# Altium PCB SZG-PMOD-TXR.PcbDoc (part 1 of 2)
Units mil, origin at the board's own origin, x right, y up, seen from the top; angles counter-clockwise.
Board outline 1968.5 x 2755.91 mil, 4 copper layers (L1-TOP, L2-GND, L3-PWR, L4-BOT), stack 59.85 mil thick; 72 components, 82 nets, 269 pads, 170 vias.
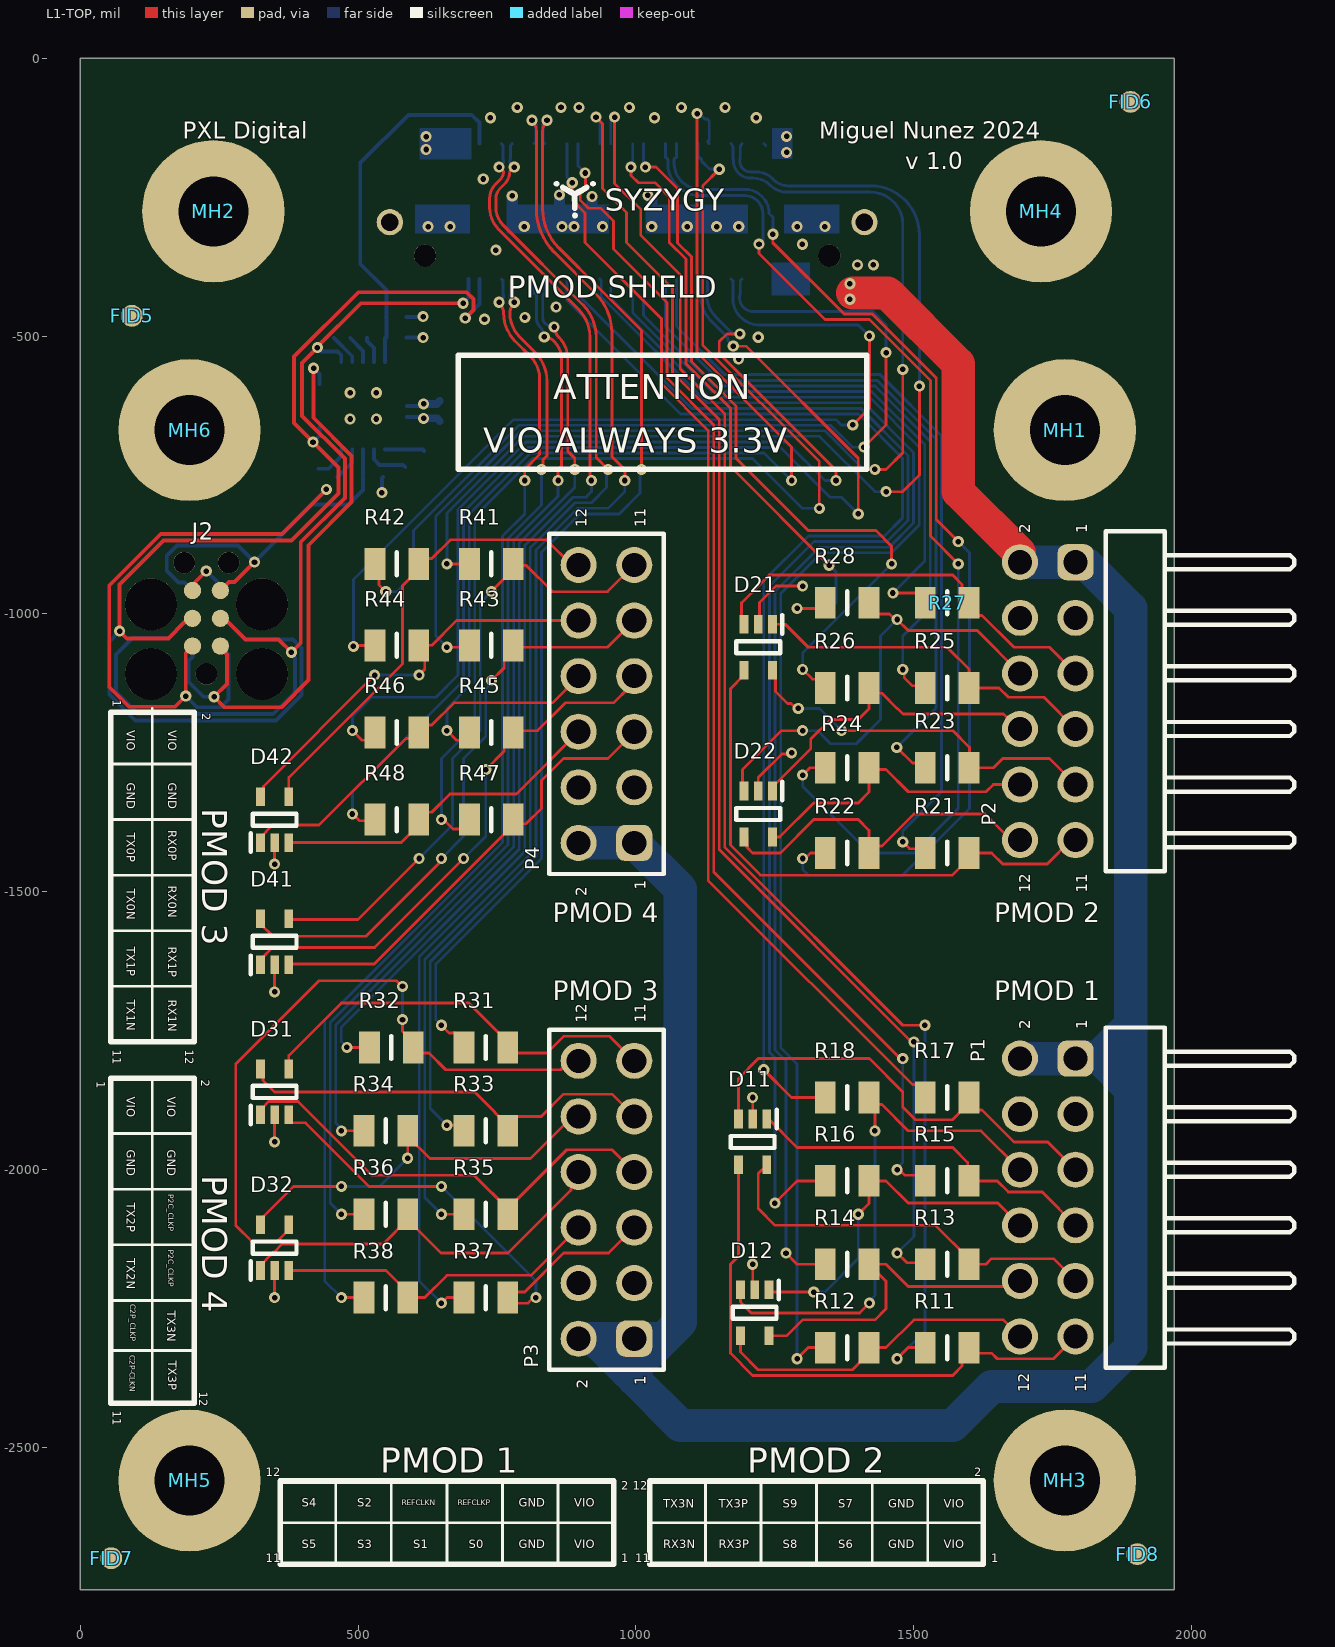
[diagram p0: L1-TOP view]
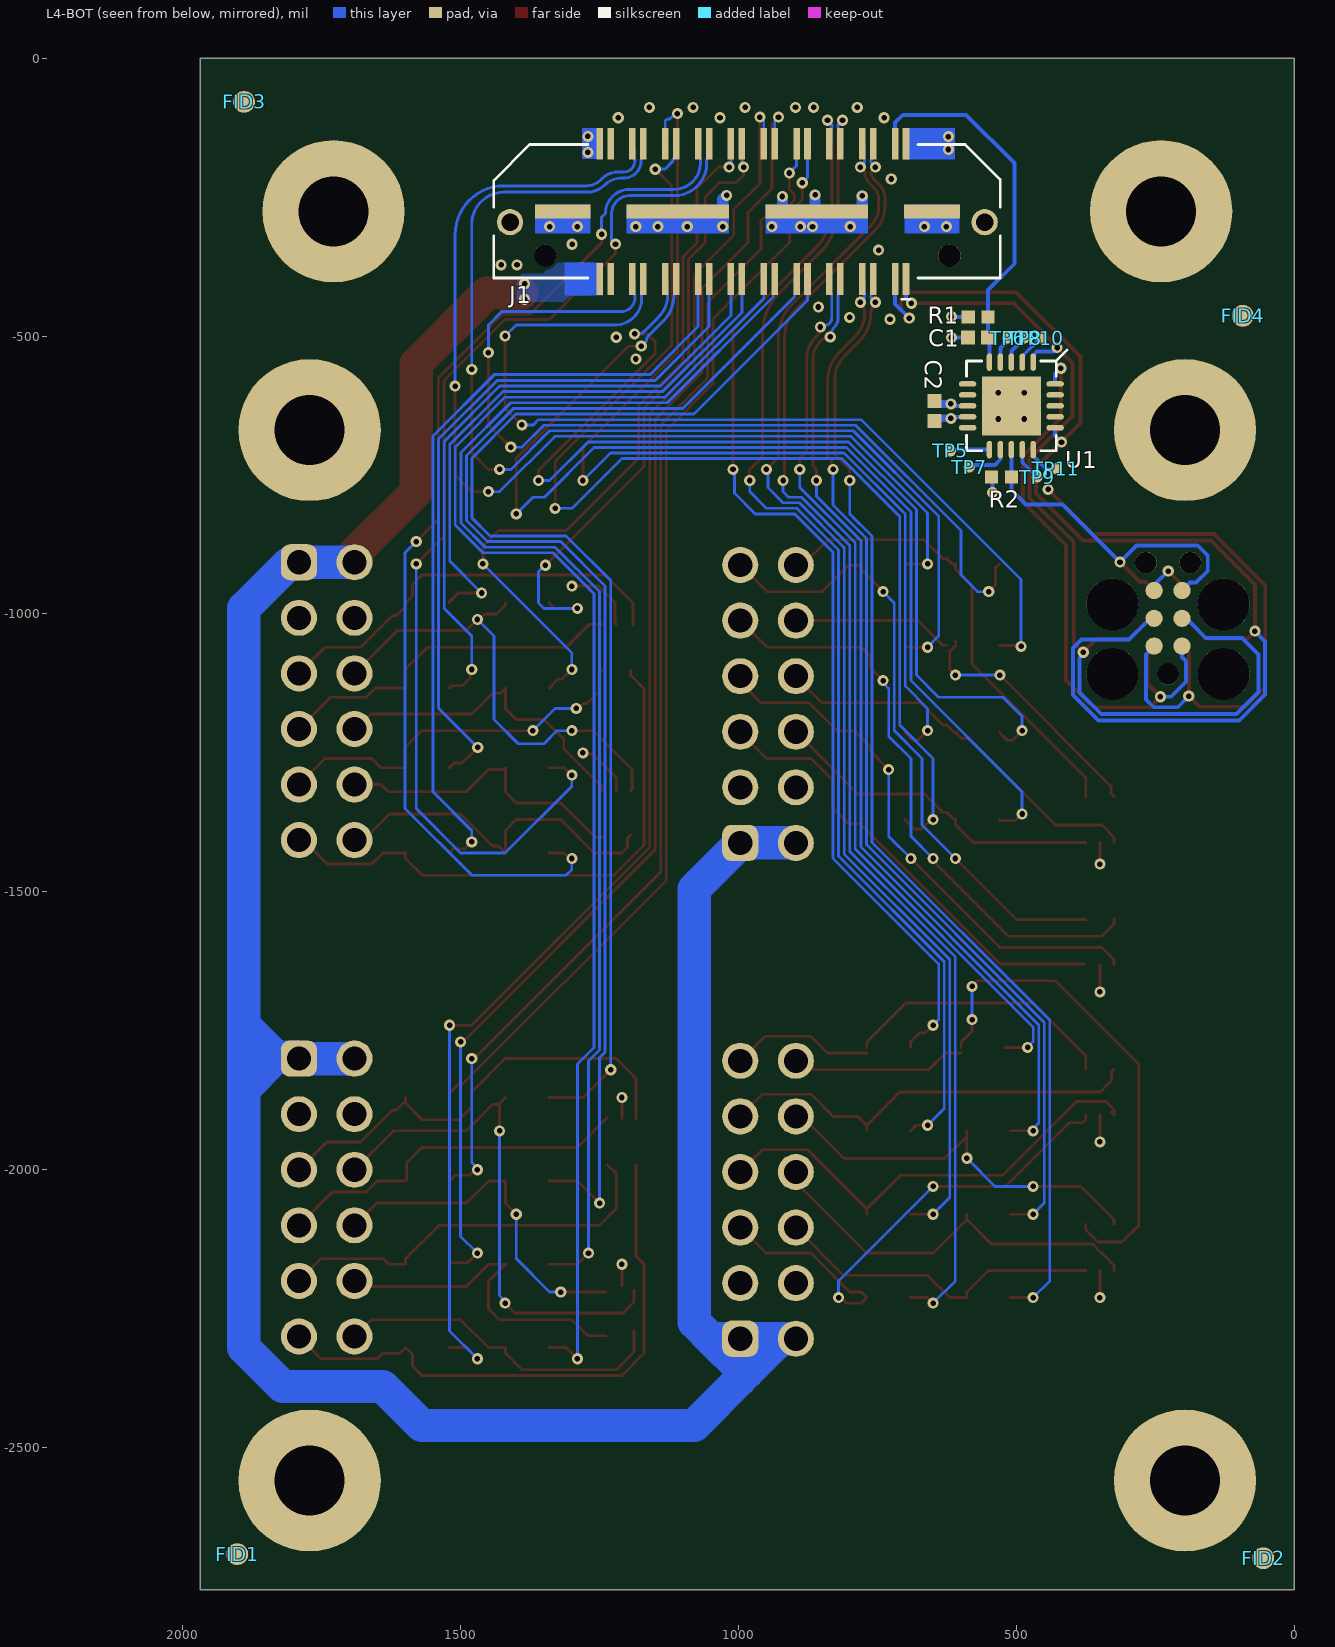
[diagram p1: L4-BOT view, seen from below]
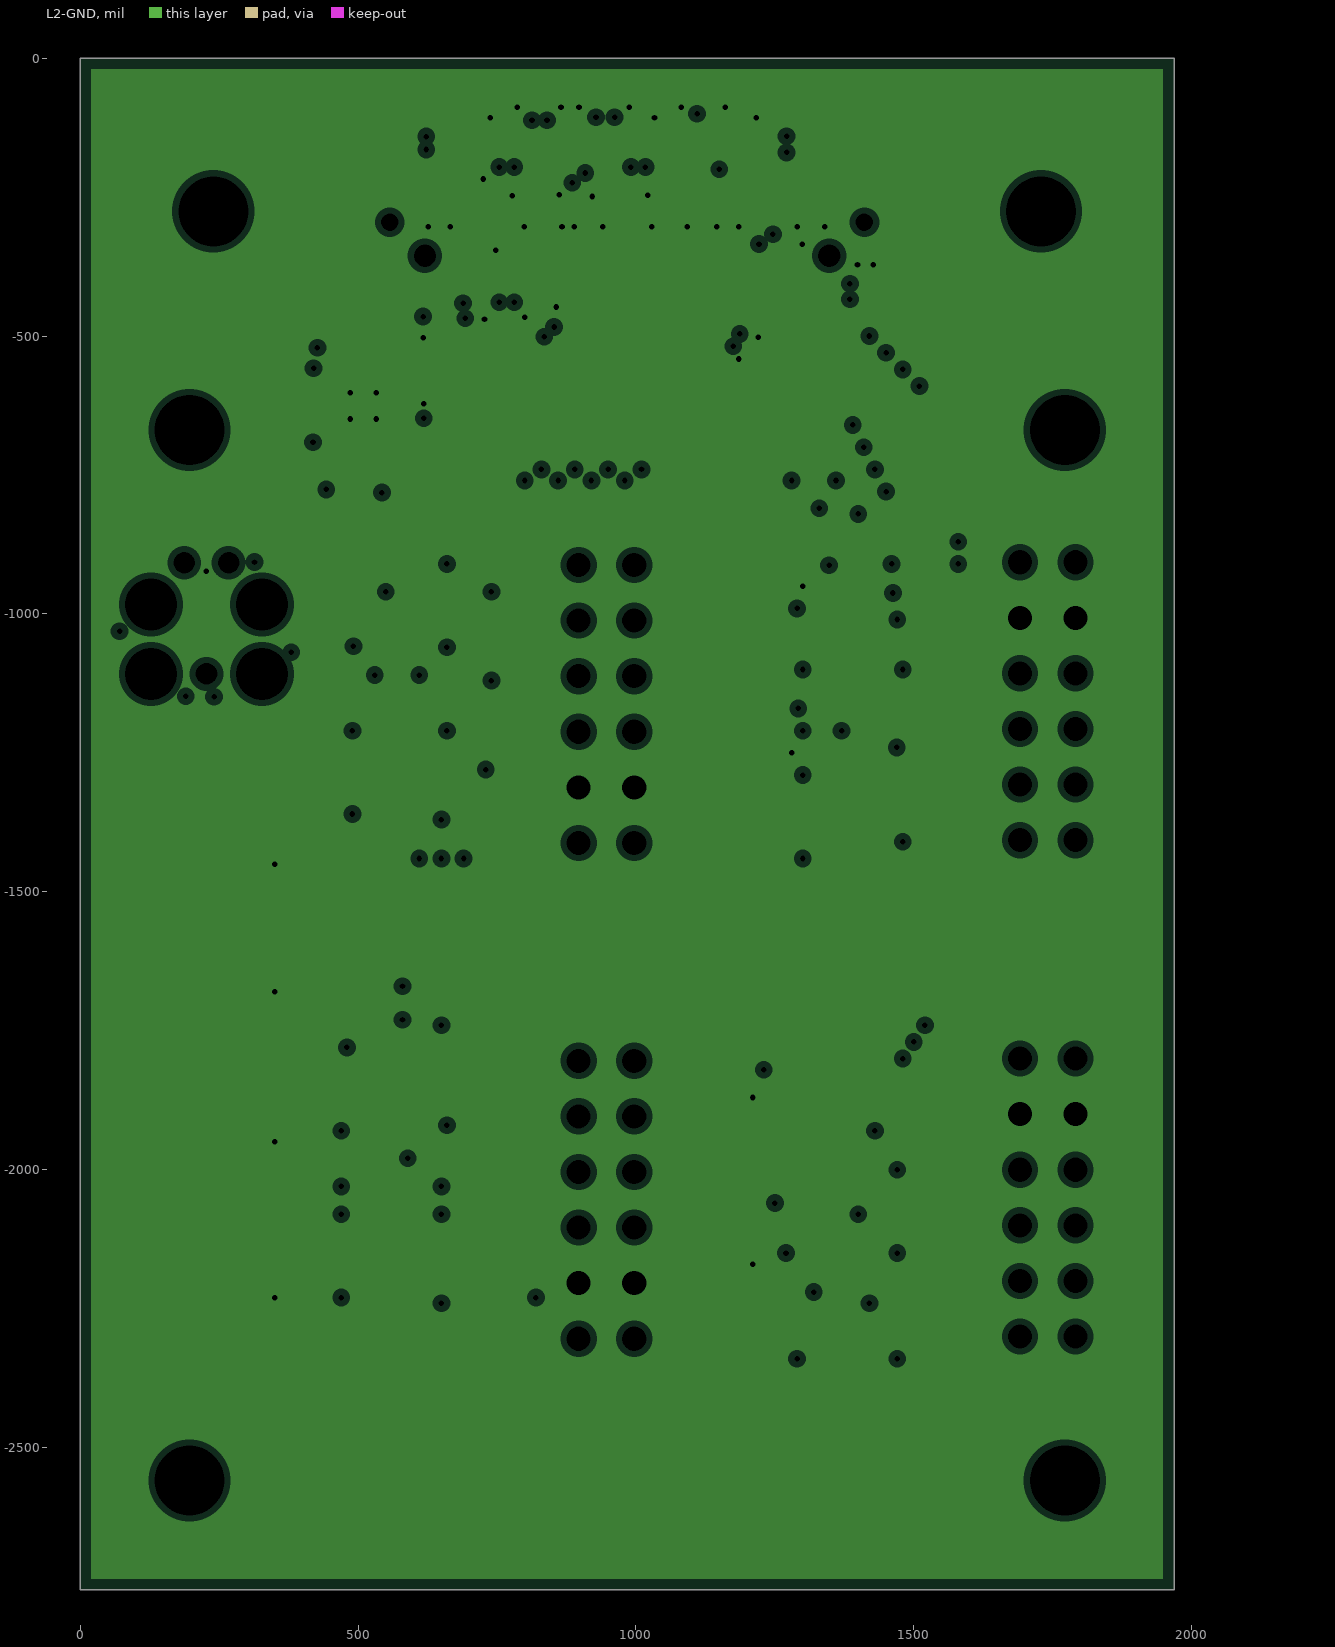
[diagram p2: L2-GND, clearances drawn from the general rule]
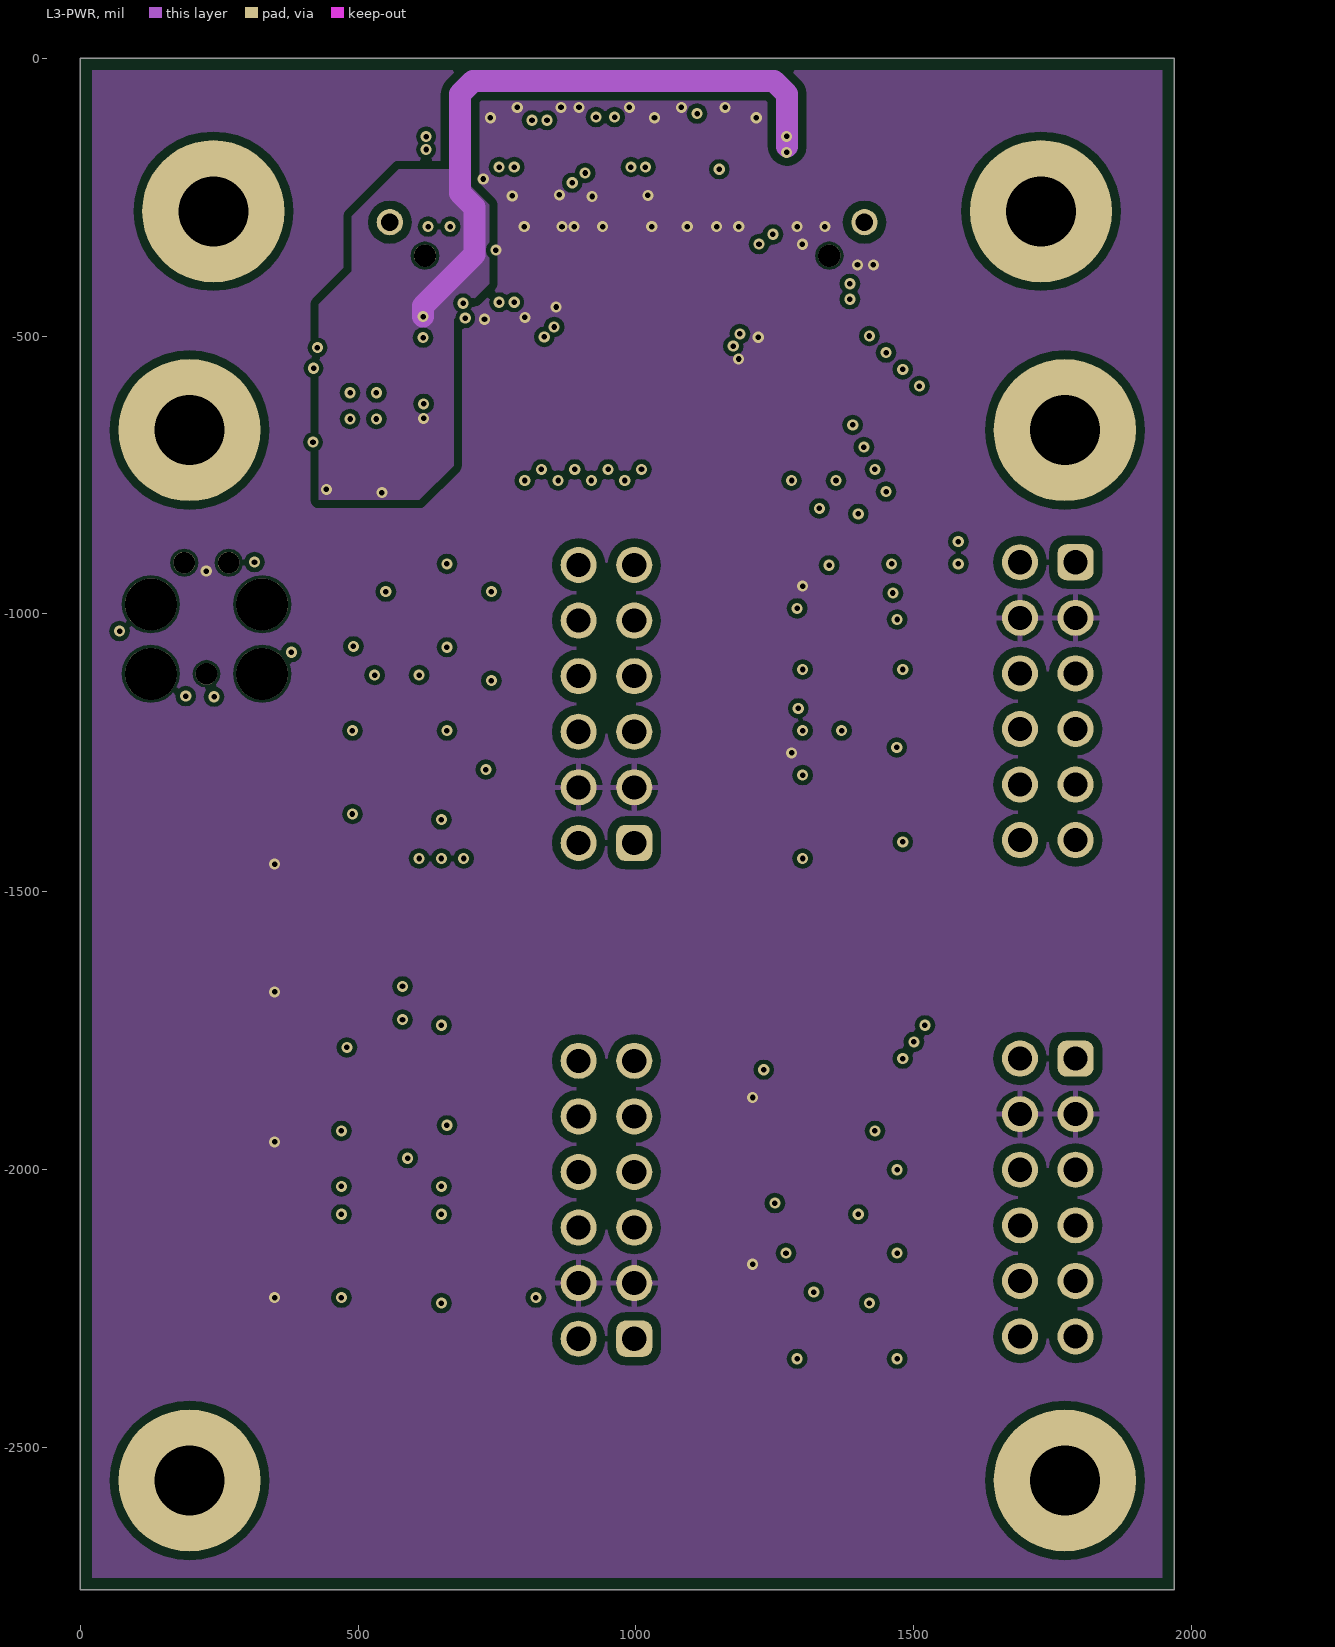
[diagram p3: L3-PWR]
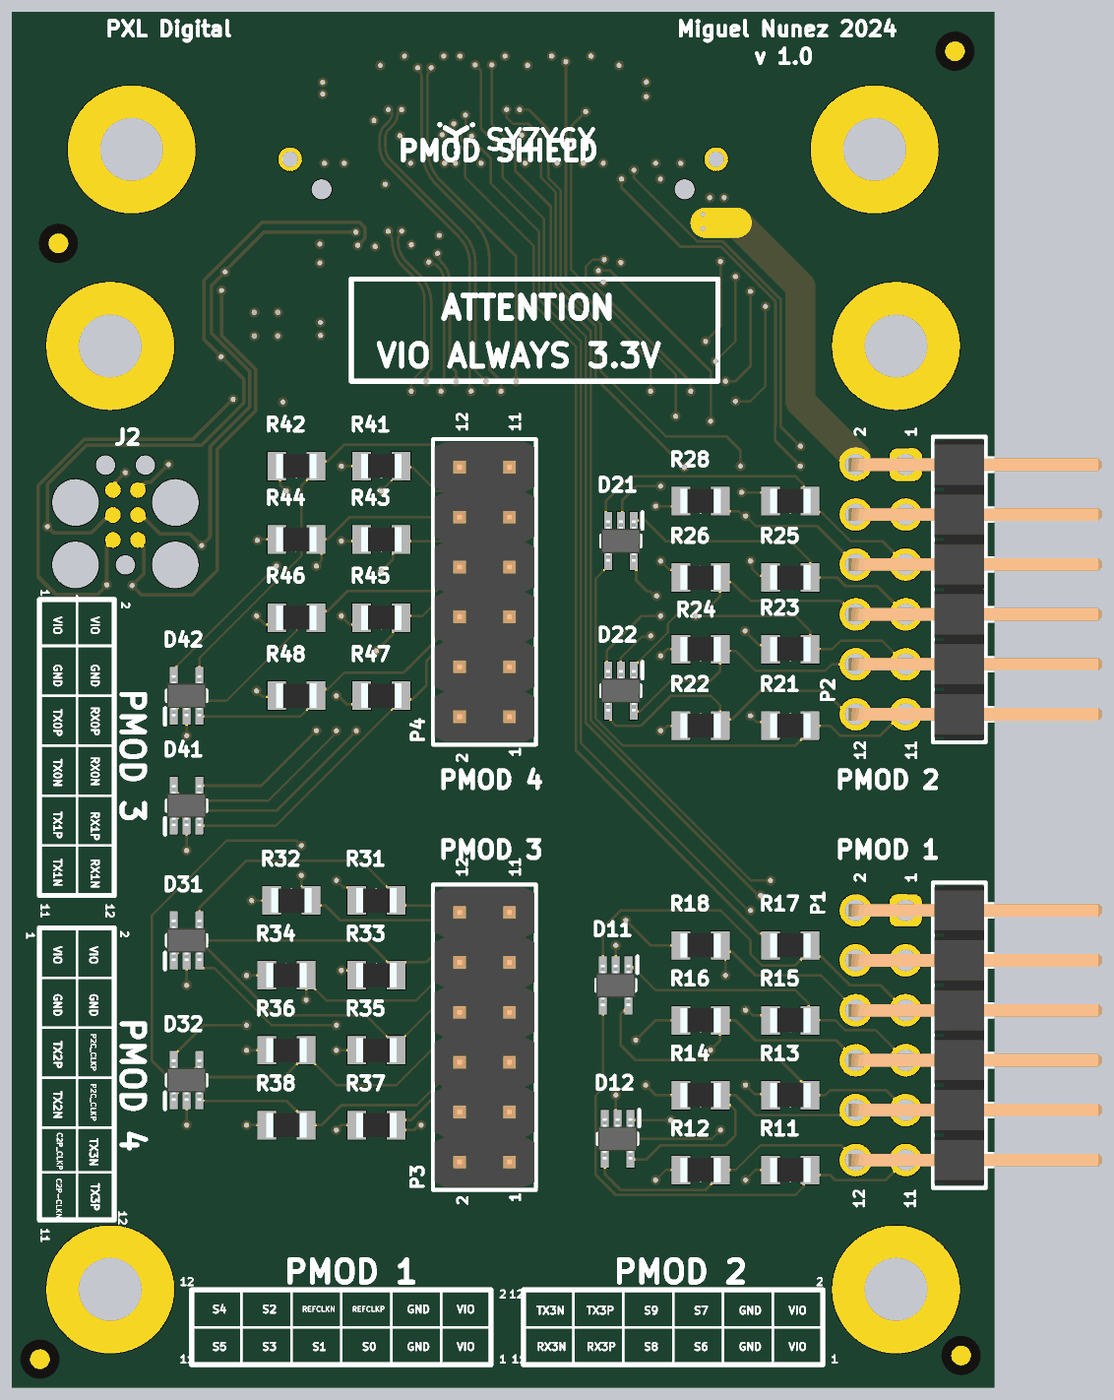
[diagram p5: 3D render of the assembled board from above, using the file's embedded part models]

## Layer stack, top to bottom
Top Solder: solder mask 0.8, Solder Resist, Dk 3.9
L1-TOP: signal copper 1.4
Dielectric1-2: prepreg 5.08, IT180A, Dk 4.2
L2-GND: plane copper 1.2, net GND
Dielectric2-3: core 44.49, IT180A, Dk 4.2
L3-PWR: signal copper 1.2
Dielectric3-4: prepreg 5.08, IT180A, Dk 4.2
L4-BOT: signal copper 1.4
Bottom Solder: solder mask 0.8, Solder Resist, Dk 3.9

## Board outline
0,-2755.91 1968.5,-2755.91 1968.5,0 0,0

## Design rules (kind name [scope] priority, off if disabled: settings)
AssemblyTestPointUsage [All] p1 off:
AssemblyTestpoint [All] p1 off: testpointundercomponent=TRUE minsize=40 maxsize=100 preferedsize=60 minholesize=0 maxholesize=40 preferedholesize=32 testpointgrid=1 usegrid=TRUE gridtolerance=0.01 allowsidetop=TRUE allowsidebottom=TRUE
Clearance ClearanceFiducial [Name Like 'FID*'] p1: gap=50 ignorepadtopadclearanceinfootprint=FALSE except(0: Arc-Hole Track-Hole SMDPad-Hole THPad-Hole Via-Hole Fill-Hole Poly-Hole Region-Hole Text-Hole) // Fiducial clearance.
Clearance [All] p2: gap=5 ignorepadtopadclearanceinfootprint=FALSE except(8: Via-Fill Via-Poly Via-Region; 12: Poly-Region Region-Region; 15: Arc-Poly Track-Poly SMDPad-Poly THPad-Poly Fill-Poly Poly-Poly)
ComponentClearance [All] p1 off: gap=10 collisioncheckmode=3 verticalgap=10 showdistances=FALSE
DiffPairsRouting okDiffRouting100ohm [All] p1: maxlimit=6 minlimit=6 mostfreqgap=6 toplayer_minwidth=5.25 toplayer_maxwidth=5.25 toplayer_prefwidth=5.25 midlayer1_minwidth=5.25 midlayer1_maxwidth=5.25 midlayer1_prefwidth=5.25 bottomlayer_minwidth=5.25 bottomlayer_maxwidth=5.25 bottomlayer_prefwidth=5.25 maxuncoupledlength=500 // Differential pair spacing for all 100ohm diff routes based on Gorilla Stackup.
FabricationTestPointUsage TestPointUsage [All] p1 off: valid=0 allowmultiple=FALSE
FabricationTestpoint Testpoint [All] p1: side=3 testpointundercomponent=TRUE minsize=20 maxsize=100 preferedsize=60 minholesize=0 maxholesize=40 preferedholesize=32 testpointgrid=1 allowsidetop=TRUE allowsidebottom=TRUE usegrid=TRUE gridtolerance=0.5
HoleSize [All] p1: absolutevalues=TRUE maxlimit=150 minlimit=10 maxpercent=80.000 minpercent=20.000
MatchedLengths Matched_SFP_DiffPair [InxSignalClass('xSignals_SFP')] p1: tolerance=10 checknetsindiffpair=TRUE checkdiffpairvsdiffpair=FALSE checkxsignals=FALSE checkothers=FALSE
MatchedLengths Matched_SFP1 [InxSignalClass('xSignals_SFP1')] p2: tolerance=185 checknetsindiffpair=FALSE checkdiffpairvsdiffpair=TRUE checkxsignals=TRUE checkothers=TRUE
MatchedLengths Matched_SFP2 [InxSignalClass('xSignals_SFP2')] p3: tolerance=185 checknetsindiffpair=FALSE checkdiffpairvsdiffpair=TRUE checkxsignals=TRUE checkothers=TRUE
MaximumViaCount okMaxViaDDR2Odt [InNetClass('okDDR2Data') Or InNetClass('okDDR2Masks') Or InNetClass('okDDR2Strobes')] p1: limit=2 // Set max via count of 2 for signals without external termination.
MaximumViaCount okMaxViaDDR2ExtTerm [InNetClass('okDDR2AddrCtrl') Or InNet('DRAM_C\K\') Or InNet('DRAM_CK')] p2: limit=3 // Set max via count of 3 for signals with external termination.
MinimumSolderMaskSliver [All] p1: minsoldermaskwidth=3
PlaneClearance [All] p1: clearance=11
PlaneConnect PlaneConnectNotVia [Not IsVia] p1: planeconnectstyle=Relief reliefexpansion=20 reliefentries=4 reliefconductorwidth=10 reliefairgap=10
PlaneConnect PlaneConnectVia [IsVia] p2: planeconnectstyle=Direct reliefexpansion=20 reliefentries=4 reliefconductorwidth=10 reliefairgap=10
PolygonConnect PolygonConnectVia [IsVia] p1: connectstyle=Direct reliefconductorwidth=8 reliefentries=4 polygonreliefangle="90 Angle" airgapwidth=10
PolygonConnect PolygonConnectNotVia [Not IsVia] p2: connectstyle=Relief reliefconductorwidth=10 reliefentries=4 polygonreliefangle="90 Angle" airgapwidth=10
RoutingVias [All] p1: holewidth=8 width=14 viastyle="Through Hole" minholewidth=8 minwidth=14 maxholewidth=40 maxwidth=60
SilkToSilkClearance [All] p1: silktosilkclearance=0.1
SilkToSolderMaskClearance SilkscreenOverComponentPads [IsPad] p1: minsilkscreentomaskgap=1 clearancetoexposedcopper=FALSE
SolderMaskExpansion [All] p1: expansion=2 istentingtop=FALSE
Width okWidthPower [InNetClass('okPower')] p1: maxlimit=100 minlimit=5 preferedwidth=16 minimp=50.000000 maximp=50.000000 favimp=50.000000
Width [All] p2: maxlimit=100 minlimit=3 preferedwidth=5 minimp=50.000000 maximp=50.000000 favimp=50.000000 // Non-Controlled routes
18 further rules are at their usual default settings.

## Components (designator, comment, footprint, x,y, rotation, side; value= is the part's Value field where it differs from the comment)
C1 "C0402C104K8PACTU" CAPC1005X06N 569,-503 r180 bottom value="0.1 u"
C2 "C0402C104K8PACTU" CAPC1005X06N 647.09,-635.13 r270 bottom value="0.1 u"
D11 "NSQA6V8AW5T2G" SOT65P210X110-5N 1210,-1950 r270 top
D12 "NSQA6V8AW5T2G" SOT65P210X110-5N 1213.63,-2257.5 r270 top
D21 "NSQA6V8AW5T2G" SOT65P210X110-5N 1220,-1060 r270 top
D22 "NSQA6V8AW5T2G" SOT65P210X110-5N 1220,-1360 r270 top
D31 "NSQA6V8AW5T2G" SOT65P210X110-5N 350,-1860 r90 top
D32 "NSQA6V8AW5T2G" SOT65P210X110-5N 350,-2140 r90 top
D41 "NSQA6V8AW5T2G" SOT65P210X110-5N 350,-1590 r90 top
D42 "NSQA6V8AW5T2G" SOT65P210X110-5N 350,-1370 r90 top
FID1 "FIDUCIAL" FID1MM/2MM-SS 1902.06,-2691.54 r90 bottom
FID2 "FIDUCIAL" FID1MM/2MM-SS 56,-2698.85 r90 bottom
FID3 "FIDUCIAL" FID1MM/2MM-SS 1889.76,-78.74 r90 bottom
FID4 "FIDUCIAL" FID1MM/2MM-SS 93,-463.68 r90 bottom
FID5 "FIDUCIAL" FID1MM/2MM-SS 93,-463.68 r90 top
FID6 "FIDUCIAL" FID1MM/2MM-SS 1889.76,-78.74 r90 top
FID7 "FIDUCIAL" FID1MM/2MM-SS 56,-2698.85 r90 top
FID8 "FIDUCIAL" FID1MM/2MM-SS 1902.06,-2691.54 r90 top
J1 "40-pin, ground protection in middle" QTH-020-01-X-D-DP-A-L 984.25,-275.59 r0 bottom locked
J2 "" TC2030-DUAL 227.36,-1107.87 r90 top
MH1 "MTG" MTG-3.2/6.5-PTH 1771.65,-669.29 r0 top locked
MH2 "MTG" MTG-3.2/6.5-PTH 239.76,-275.59 r0 top locked
MH3 "MTG" MTG-3.2/6.5-PTH 1771.65,-2559.06 r0 top locked
MH4 "MTG" MTG-3.2/6.5-PTH 1728.74,-275.59 r0 top locked
MH5 "MTG" MTG-3.2/6.5-PTH 196.85,-2559.06 r0 top locked
MH6 "MTG" MTG-3.2/6.5-PTH 196.85,-669.29 r0 top locked
P1 "61301221021" 61301221021 1898.48,-2050 r90 top
P2 "61301221021" 61301221021 1898.48,-1157 r90 top
P3 "61301221121" 61301221121 947,-2054 r90 top
P4 "61301221121" 61301221121 947,-1162 r90 top
R1 "CRCW040210K0FKED" RESC1005X06N 569,-465.74 r0 bottom value="10.0 k"
R2 "CRCW040210K0FKED" RESC1005X06N 527,-753.74 r0 bottom value="10.0 k"
R11 "200" RESC2012X50N 1560,-2320 r0 top
R12 "200" RESC2012X50N 1380,-2320 r180 top
R13 "200" RESC2012X50N 1560,-2170 r0 top
R14 "200" RESC2012X50N 1380,-2170 r180 top
R15 "200" RESC2012X50N 1560,-2020 r0 top
R16 "200" RESC2012X50N 1380,-2020 r180 top
R17 "200" RESC2012X50N 1560,-1870 r0 top
R18 "200" RESC2012X50N 1380,-1870 r180 top
R21 "200" RESC2012X50N 1560,-1430 r0 top
R22 "200" RESC2012X50N 1380,-1430 r180 top
R23 "200" RESC2012X50N 1560,-1276.67 r0 top
R24 "200" RESC2012X50N 1380,-1276.67 r180 top
R25 "200" RESC2012X50N 1560,-1133.33 r0 top
R26 "200" RESC2012X50N 1380,-1133.33 r180 top
R27 "200" RESC2012X50N 1560,-980 r0 top
R28 "200" RESC2012X50N 1380,-980 r180 top
R31 "200" RESC2012X50N 730,-1780 r0 top
R32 "200" RESC2012X50N 560,-1780 r180 top
R33 "200" RESC2012X50N 730,-1930 r0 top
R34 "200" RESC2012X50N 550,-1930 r180 top
R35 "200" RESC2012X50N 730,-2080 r0 top
R36 "200" RESC2012X50N 550,-2080 r180 top
R37 "200" RESC2012X50N 730,-2230 r0 top
R38 "200" RESC2012X50N 550,-2230 r180 top
R41 "200" RESC2012X50N 740,-910 r0 top
R42 "200" RESC2012X50N 570,-910 r180 top
R43 "200" RESC2012X50N 740,-1056.67 r0 top
R44 "200" RESC2012X50N 570,-1056.67 r180 top
R45 "200" RESC2012X50N 740,-1213.33 r0 top
R46 "200" RESC2012X50N 570,-1213.33 r180 top
R47 "200" RESC2012X50N 740,-1370 r0 top
R48 "200" RESC2012X50N 570,-1370 r180 top
TP5 "TESTPOINT-SMD20" TP-SMD20 619,-706.74 r90 bottom
TP6 "TESTPOINT-SMD20" TP-SMD20 516,-503.74 r90 bottom
TP7 "TESTPOINT-SMD20" TP-SMD20 585,-735.74 r90 bottom
TP8 "TESTPOINT-SMD20" TP-SMD20 486,-503.74 r90 bottom
TP9 "TESTPOINT-SMD20" TP-SMD20 463,-753.74 r90 bottom
TP10 "TESTPOINT-SMD20" TP-SMD20 457,-503.74 r90 bottom
TP11 "TESTPOINT-SMD20" TP-SMD20 429,-738.74 r90 bottom
U1 "ATTINY44A-MU" QFN-EP-20 509.32,-625.68 r270 bottom

## Footprints (in the part's own frame and the unit in brackets; to place one, negate y for a bottom-side part, rotate by r counter-clockwise, add the part's x,y. Pads: shape width x height; smd on the part's side, far side on the other; paste and mask are expansions set on the pad)
61301221021 [mm] "Pin Header, pitch 2.54 mm, THT, Angled, dual row, 12p"
  rrect50% 1.65x1.65 hole 1.1: 1(6.35,2.73)
  round 1.65 hole 1.1: 2(6.35,5.27) 3(3.81,2.73) 4(3.81,5.27) 5(1.27,2.73) 6(1.27,5.27) 7(-1.27,2.73) 8(-1.27,5.27) 9(-3.81,2.73) 10(-3.81,5.27) 11(-6.35,2.73) 12(-6.35,5.27)
  silkscreen extent -7.77,-7.27 7.77,1.35, body extent -7.62,-7.27 7.62,5.63, height 5.12
61301221121 [mm] "Pin Header, pitch 2.54 mm, THT, Vertical, dual row, 12p"
  rrect50% 1.65x1.65 hole 1.1: 1(-6.35,-1.27)
  round 1.65 hole 1.1: 2(-6.35,1.27) 3(-3.81,-1.27) 4(-3.81,1.27) 5(-1.27,-1.27) 6(-1.27,1.27) 7(1.27,-1.27) 8(1.27,1.27) 9(3.81,-1.27) 10(3.81,1.27) 11(6.35,-1.27) 12(6.35,1.27)
  silkscreen extent -7.77,-2.62 7.77,2.62, body extent -7.62,-2.54 7.62,2.54, height 8.59
CAPC1005X06N [mm] "Chip Capacitor, 2-Leads, Body 1.00x0.50mm, IPC Medium Density"
  rect 0.64x0.64 smd: 1(-0.46,0) 2(0.46,0)
  body extent -0.55,-0.3 0.55,0.3, height 0.6
FID1MM/2MM-SS [mm] "Fiducial 1mm copper, 2mm soldermask, single-side"
  round 1 smd paste-0.5 mask+0.5: FID?(0,0)
MTG-3.2/6.5-PTH [mm] "Mounting hole, 3.2mm ID, 6.5mm OD, plated"
  round 6.5 hole 3.2: 1(0,0)
QFN-EP-20 [mm]
  oval 0.8x0.25 smd mask+0.051: 1(-2,1) 2(-2,0.5) 3(-2,0) 4(-2,-0.5) 5(-2,-1) 11(2,-1) 12(2,-0.5) 13(2,0) 14(2,0.5) 15(2,1)
  oval 0.25x0.8 smd mask+0.051: 6(-1,-2) 7(-0.5,-2) 8(0,-2) 9(0.5,-2) 10(1,-2) 16(1,2) 17(0.5,2) 18(0,2) 19(-0.5,2) 20(-1,2)
  rect 2.7x2.7 smd paste-100 mask+0.051: PAD(0,0)
  silkscreen extent -2.55,-2.05 2.05,2.55
QTH-020-01-X-D-DP-A-L [mm] "0.5mm hi-speed, high-density header (female), 80-pin, latching, ground protection in middle"
  rect 2.54x0.64 smd mask+0.051: 0(-8.44,0) 0(8.44,0)
  rect 4.7x0.64 smd mask+0.051: 0(-3.17,0) 0(3.18,0)
  rect 0.3x1.45 smd mask+0.051: 1(-7.25,3.09) 2(-7.25,-3.09) 3(-6.75,3.09) 4(-6.75,-3.09) 5(-5.75,3.09) 6(-5.75,-3.09) 7(-5.25,3.09) 8(-5.25,-3.09) 9(-4.25,3.09) 10(-4.25,-3.09) 11(-3.75,3.09) 12(-3.75,-3.09) 13(-2.75,3.09) 14(-2.75,-3.09) 15(-2.25,3.09) 16(-2.25,-3.09) 17(-1.25,3.09) 18(-1.25,-3.09) 19(-0.75,3.09) 20(-0.75,-3.09) 21(0.25,3.09) 22(0.25,-3.09) 23(0.75,3.09) 24(0.75,-3.09) 25(1.75,3.09) 26(1.75,-3.09) 27(2.25,3.09) 28(2.25,-3.09) 29(3.25,3.09) 30(3.25,-3.09) 31(3.75,3.09) 32(3.75,-3.09) 33(4.75,3.09) 34(4.75,-3.09) 35(5.25,3.09) 36(5.25,-3.09) 37(6.25,3.09) 38(6.25,-3.09) 39(6.75,3.09) 40(6.75,-3.09)
  round 1.2 hole 0.8 paste-2539.97: MH(-10.845,0.5) MH(10.845,0.5)
  round 1.02 hole 1.02 unplated paste-2539.97: MH(-9.24,2.03) MH(9.24,2.03)
  silkscreen extent -11.55,-3.05 11.58,4.01
RESC1005X06N [mm] "Chip Resistor, 2-Leads, Body 1.00x0.50mm, IPC Medium Density"
  rect 0.6x0.6 smd: 1(-0.45,0) 2(0.45,0)
  body extent -0.55,-0.3 0.55,0.3, height 0.6
RESC2012X50N [mm]
  rect 0.95x1.45 smd: 1(-1,0) 2(1,0)
  silkscreen extent 0,-0.53 0,0.53, body extent -1.02,-0.63 1.02,0.63, height 0.5
SOT65P210X110-5N [mm]
  rect 0.85x0.4 smd: 1(-1.05,0.65) 2(-1.05,0) 3(-1.05,-0.65) 4(1.05,-0.65) 5(1.05,0.65)
  silkscreen extent -1.48,-1 0.28,1.1, body extent -1.05,-1 1.05,1, height 1.1
TC2030-DUAL [mil]
  round 31 smd paste-393.7: 1(50,-25) 2(50,25) 3(100,-25) 4(100,25) 5(150,-25) 6(150,25)
  round 31 smd far side paste-393.7: 1(50,25) 2(50,-25) 3(100,25) 4(100,-25) 5(150,25) 6(150,-25)
  round 39 hole 39 unplated: A(0,0) B(200,40) C(200,-40)
  round 93.5 hole 93.5 unplated: D(0,-100) E(125,-100) F(0,100) G(125,100)
TP-SMD20 [mil] "Test point, surface-mount, 20mil"
  round 20 smd paste-78.74: 1(0,0)

## Part data
C1 C2: library part 000070, "Ceramic capacitor", Manufacturer=Kemet, Tolerance (%)=10, ValueFloat=1E-7, Description 2="SM-0402, 10%, 10v", Manufacturer_PN=C0402C104K8PACTU, PartNumber=000070
  C1: updated_on="5/15/2017 4:50:04 PM"
  C2: updated_on="11/17/2016 12:16:56 PM"
D11 D12 D21 D22 D31 D32 D41 D42: "Diode", Manufacturer_Name=onsemi, Mouser Part Number=863-NSQA6V8AW5T2G, Arrow Part Number=NSQA6V8AW5T2G, Arrow Price/Stock=https://www.arrow.com/en/products/nsqa6v8aw5t2g/on-semiconductor?region=nac, Datasheet Link=http://www.onsemi.com/pub/Collateral/NSQA6V8AW5T2-D.PDF, Height=1.1mm, Manufacturer_Part_Number=NSQA6V8AW5T2G, Mouser Price/Stock=https://www.mouser.co.uk/ProductDetail/onsemi/NSQA6V8AW5T2G?qs=ZXBb0xZ9WeDSeR92l0JbzA%3D%3D
FID1 FID2 FID3 FID4 FID5 FID6 FID7 FID8: "PCB fiducial"
J1: library part 001605, "0.5mm hi-speed, high-density header (female)", Manufacturer=Samtec, Manufacturer_PN=QTH-020-01-F-D-DP-A, AligniPartNumber=001605, parttype=Connector
J2: library part 002062, "Tag-Connect 6-pin Plug-of-Nails spring-pin cable footprint", Manufacturer=Tag-Connect, Manufacturer_PN=TC2030-IDC, AligniPartNumber=002062, parttype=Connector
MH1 MH2 MH3 MH4 MH5 MH6: "Mounting hole"
P1 P2: "WR-PHD Pin Header, THT, Angled, pitch 2.54mm, 2 Row, 12P", Contact Resistance=20mΩ, Manufacturer="Wurth Elektronik", Operating Temperature Max=105°C, Operating Temperature Min=-40°C, Rated Current=3A, Withstanding Voltage=500V, Working Voltage=250V, Category="Board-to-Board Connectors", ComponentLink1Description="Website Link", ComponentLink1URL=https://www.we-online.com/redexpert/article/61301221021?ad, ComponentLink2Description="Datasheet Link", ComponentLink2URL=https://www.we-online.com/redexpert/spec/61301221021?ad, Gender="Pin Header", Manufacturer Part Number=61301221021, Match Code=WR-PHD, Mount="Through Hole", Number of Pins=12, Number of Rows=2, Orientation=Angled, Packaging=Bag, Pitch=2.54mm
P3 P4: "WR-PHD Pin Header, THT, Vertical, pitch 2.54mm, 2 Row, 12P", Contact Resistance=20mΩ, Manufacturer="Wurth Elektronik", Operating Temperature Max=105°C, Operating Temperature Min=-40°C, Rated Current=3A, Withstanding Voltage=500V, Working Voltage=250V, Category="Board-to-Board Connectors", ComponentLink1Description="Website Link", ComponentLink1URL=https://www.we-online.com/redexpert/article/61301221121?ad, ComponentLink2Description="Datasheet Link", ComponentLink2URL=https://www.we-online.com/redexpert/spec/61301221121?ad, Gender="Pin Header", Manufacturer Part Number=61301221121, Match Code=WR-PHD, Mount="Through Hole", Number of Pins=12, Number of Rows=2, Orientation=Vertical, Packaging=Bag, Pitch=2.54mm
R1 R2: library part 001521, "Thick-film resistor", Manufacturer=Vishay, Tolerance (%)=1, ValueFloat=10000, Description 2="SM-0402, 1%, 1/16W", Manufacturer_PN=CRCW040210K0FKED, PartNumber=001521, updated_on="3/21/2017 2:29:49 PM", x_lifecycle_status=Production
R11 R12 R13 R14 R15 R16 R17 R18 R21 R22 R23 R24 R25 R26 R27 R28 R31 R32 R33 R34 R35 R36 R37 R38 R41 R42 R43 R44 R45 R46 R47 R48: library part 0805_SMD_Resistor, "Resistor", Manufacturer_Name=Vishay, Manufacturer_Part_Number=CRCW08055K60JNEA, Datasheet Link=http://www.vishay.com/docs/20035/dcrcwe3.pdf, Height=0.5mm
TP5 TP6 TP7 TP8 TP9 TP10 TP11: "Test point, surface-mount, 20mil"
U1: library part 001552, "8-bit MCU, 4 KB flash, 256 bytes EEPROM", Manufacturer=Microchip, Manufacturer_PN=ATTINY44A-MU, PartNumber=001552, updated_on="5/23/2017 10:51:21 AM", x_lifecycle_status=Production

## Via types
v1: diameter 20, hole 10, L1-TOP to L4-BOT, tented both sides, 170 vias

## Nets (pads, with @x,y where several pads share a name; then routed paths per layer and width w, separated by ;. In a path a pad name is that pad's centre, name@x,y a point inside that pad or via, vN(x,y) a via of type N, cw(c..) or ccw(c..) an arc to the next point about the centre after c; other vN are vias at no path point)
+3.3V: C2.2 J1.40 J2.2 R1.2 R2.2 U1.9 | length 2363.2
  L1-TOP w7: J2.2@202.36,-1057.87 190,-1070.24 v1(190,-1148) 171,-1167 88,-1167 52.5,-1131.5 52.5,-948.53 145.03,-856 363,-856 v1(443,-776)
  L3-PWR w40: v1(617,-465) 617,-446 709.45,-353.55 709.45,-268.51 683.53,-242.58 683.53,-64.76 706.96,-41.33 1248.57,-41.33 1272,-64.76 1272,-159
  L4-BOT w7: v1(190,-1148) 209.98,-1167.98 253.02,-1167.98 267,-1154 267,-1072.51 J2.2@252.36,-1057.87 ; v1(543,-781.74) 543,-755.46 R2.2@544.72,-753.74 ; R1.2@586.72,-465.74 v1@614,-465.74 ; U1.9@588.06,-645.36 615.33,-645.36 v1(618.09,-648.13)
  L4-BOT w14: v1(618.09,-648.13) 641.98,-648.13 C2.2@647.09,-653.24
  other v1: 1271,-169.74 1271,-140.74
+5V: J1.2
  other v1: 622.65,-164.5 622.65,-141.21
C2P_CLKN: J1.36 R41.1 | length 1949.2
  L1-TOP w5: v1(660,-910) R41.1@700.63,-910 ; v1(1450,-780) 1480,-780 1510,-750 v1(1510,-590)
  L4-BOT w5: v1(660,-910) 660,-818.28 797.78,-680.5 1330.5,-680.5 1430,-780 v1(1450,-780)
  L4-BOT w5.25: J1.36@1190.94,-153.94 ccw(c1198.86,-161.86) 1187.66,-161.86 1187.66,-181.33 cw(c1186.06,-181.33) 1187.2,-182.46 ccw(c1188.33,-183.59) 1186.73,-183.59 1186.73,-185.04 ccw(c1206.41,-185.04) 1206.41,-204.72 1215.75,-204.72 cw(c1215.75,-247.69) 1246.13,-217.31 1247.48,-218.66 ccw(c1274.61,-191.53) 1274.61,-229.89 1422.24,-229.89 cw(c1422.24,-317.65) 1510,-317.65 v1(1510,-590)
C2P_CLKP: J1.34 R43.1 | length 2036.2
  L1-TOP w5: v1(660,-1060) 697.3,-1060 R43.1@700.63,-1056.67 ; v1(1430,-740) 1450,-740 1480,-710 v1(1480,-560)
  L4-BOT w5: v1(660,-1060) 640,-1040 640,-824.14 793.64,-670.5 1340,-670.5 1409.5,-740 v1(1430,-740)
  L4-BOT w5.25: J1.34@1171.26,-153.94 cw(c1163.34,-161.86) 1174.54,-161.86 1174.54,-181.33 ccw(c1176.14,-181.33) 1175.01,-182.46 cw(c1173.88,-183.59) 1175.48,-183.59 1175.48,-185.04 ccw(c1206.41,-185.04) 1206.41,-215.97 1211.09,-215.97 cw(c1211.09,-258.94) 1241.47,-228.56 ccw(c1271.85,-198.18) 1271.85,-241.14 1422.24,-241.14 cw(c1422.24,-298.9) 1480,-298.9 v1(1480,-560)
GND: C1.1 C2.1 D11.2 D12.2 D21.2 D22.2 D31.2 D32.2 D41.2 D42.2 J1.0 J2.6 P1.3 P1.4 P2.3 P2.4 P3.3 P3.4 P4.3 P4.4 U1.8 U1.PAD | length 994.8
  L1-TOP w5: v1(350,-2230) D32.2@350,-2181.34 ; v1(350,-1950) D31.2@350,-1901.34 ; v1(350,-1680) D41.2@350,-1631.34 ; v1(350,-1450) D42.2@350,-1411.34 ; D12.2@1210,-2209.03 v1(1210,-2170) ; D11.2@1210,-1907.26 v1(1210,-1870) ; D22.2@1220,-1318.66 1220,-1294.43 1262.5,-1251.93 1278.07,-1251.93 v1(1280,-1250) ; D21.2@1220,-1018.66 1222.46,-1016.2 1222.46,-979.51 1251.97,-950 v1(1300,-950)
  L1-TOP w7: J2.6@202.36,-957.87 206.96,-953.28 206.96,-943.05 v1(227,-923)
  L4-BOT w7: v1(227,-923) 247.77,-943.77 247.77,-953.28 J2.6@252.36,-957.87 ; C1.1@587.11,-503 v1(617,-503) ; U1.8@588.06,-625.68 614.54,-625.68 v1(618.09,-622.13)
  L4-BOT w14: v1(618.09,-622.13) 641.98,-622.13 C2.1@647.09,-617.02
  L4-BOT w20: v1(777.56,-248.03) 777.56,-272.99 780.16,-275.59 J1.0@859.45,-275.59 J1.0@864.17,-275.59 ; v1(862.2,-246.06) 862.2,-273.62 J1.0@864.17,-275.59 ; J1.0@918.66,-275.59 J1.0@864.17,-275.59 ; v1(921.26,-249.02) 921.26,-284.41 v1(940,-303.15) ; v1(1021.65,-247.05) 1028.44,-253.84 v1(1028.44,-303.15)
  other v1: 485.69,-649.3 532.94,-649.3 485.69,-602.06 532.94,-602.06 1184.75,-541.36 1220.16,-502.23 727.6,-469.92 800.2,-466.54 856.3,-447.83 1398.62,-372.05 1427.17,-372.05 748.03,-345.47 1299.45,-334.91 626,-303.12 665.81,-303.12 799,-303.15 867,-303.28 888.78,-303.28 1092.38,-303.15 1145.08,-303.15 1185,-303.15 1290,-303.15 1340,-303.15 725.39,-217.52 738.19,-107.28 1033.46,-107.28 1216.54,-107.28 786.42,-88.58 865.16,-88.58 897.64,-88.58 988.19,-88.58 1081.69,-88.58 1160.43,-88.58
MCU_MISO: J2.1 U1.20 | length 1082.2
  L1-TOP w7: J2.1@252.36,-1057.87 252.36,-1061.47 264,-1073.11 264,-1126 v1(241,-1149) 260,-1168 362,-1168 411,-1119 411,-876.4 488.57,-798.83 488.57,-715.69 420,-647.12 v1(420,-558)
  L4-BOT w7: J2.1@202.36,-1057.87 202.36,-1077.64 195,-1085 195,-1122 222,-1149 v1(241,-1149) ; v1(420,-558) 430.57,-568.57 U1.20@430.57,-586.31
MCU_RESET_B: J2.5 R2.1 U1.13 | length 666.3
  L1-TOP w7: J2.5@252.36,-957.87 267.83,-942.41 277.87,-942.41 313.52,-906.76 v1(313.75,-906.76)
  L4-BOT w7: J2.5@202.36,-957.87 202.06,-957.87 187.66,-943.48 176.91,-943.48 156,-922.57 156,-895 174,-877 284,-877 v1(313.75,-906.76) 417.51,-803 483,-803 509.28,-776.72 R2.1@509.28,-753.74 ; R2.1@509.32,-749.71 U1.13@509.32,-704.42
MCU_SCL_USCK: J1.1 J2.3 U1.1 | length 1851
  L1-TOP w7: J2.3@252.36,-1007.87 258.86,-1007.87 266.67,-1015.68 267.32,-1015.68 297.64,-1046 357,-1046 v1(380,-1069) 397,-1052 397,-870.72 476.57,-791.15 476.57,-720.66 399.53,-643.62 399.53,-548.47 v1(427,-521) ; v1@425.26,-521 505.26,-441 v1(689,-441)
  L4-BOT w7: J2.3@202.36,-1007.87 195.87,-1007.87 188.23,-1015.51 187.23,-1015.51 159.43,-1043.31 94.49,-1043.31 64.6,-1073.19 64.6,-1140.34 104.24,-1179.98 347.6,-1179.98 386.5,-1141.08 386.5,-1079.02 380,-1072.52 v1(380,-1069) ; v1(427,-521) 433.74,-527.74 463,-527.74 469.94,-534.69 U1.1@469.94,-546.94 ; v1(689,-441) 698.82,-431.18 J1.1@698.82,-397.24
MCU_SDA_MOSI: J1.3 J2.4 U1.16 | length 2264.5
  L1-TOP w7: J2.4@202.36,-1007.87 195.87,-1007.87 188.23,-1015.51 187.23,-1015.51 158.74,-1044 84,-1044 v1(71,-1031) 71,-947 150,-868 380.03,-868 464.57,-783.46 464.57,-736.57 v1(419,-691) 384.75,-656.75 384.75,-537.08 500.58,-421.26 695.42,-421.26 707.5,-433.34 707.5,-453.34 v1(692.91,-467.92)
  L4-BOT w7: v1(71,-1031) 52.6,-1049.4 52.6,-1145.31 99.27,-1191.98 352.57,-1191.98 398.5,-1146.05 398.5,-1061.34 383.16,-1046 297.39,-1046 267.2,-1015.81 266.79,-1015.81 258.86,-1007.87 J2.4@252.36,-1007.87 ; v1(419,-691) 430.57,-679.43 U1.16@430.57,-665.05 U1.16@430.27,-664.74 ; v1(692.91,-467.92) 718.5,-442.33 J1.3@718.5,-397.24
NetD11_1: D11.1 P1.7 R15.2 | length 651.7
  L1-TOP w5: D11.1@1237.13,-1907.13 1290,-1960 1570,-1960 1596.89,-1986.89 1596.89,-2017.52 R15.2@1599.37,-2020 1650,-2020 1670,-2040 1731,-2040 P1.7@1791,-2100
NetD11_3: D11.3 P1.5 R17.2 | length 829.4
  L1-TOP w5: D11.3@1184.41,-1908.66 1184.41,-1835.59 1220,-1800 1420,-1800 1480,-1860 1480,-1887.22 1502.78,-1910 1569.21,-1910 1599.37,-1879.84 R17.2@1599.37,-1876.44 ; R17.2@1599.37,-1870 R17.2@1599.37,-1876.44 ; P1.5@1791,-2000 1741,-1950 1680,-1950 1622.64,-1892.64 1615.57,-1892.64 1601.07,-1878.14 R17.2@1599.37,-1876.44
NetD11_4: D11.4 P1.11 R11.2 | length 1039.8
  L1-TOP w5: D11.4@1184.41,-1991.34 1184.41,-2155.59 1170,-2170 1170,-2330 1210,-2370 1570,-2370 1586.89,-2353.11 1586.89,-2332.48 R11.2@1599.37,-2320 1609.37,-2330 1640,-2330 1650,-2340 1751,-2340 P1.11@1791,-2300
NetD11_5: D11.5 P1.9 R13.2 | length 724
  L1-TOP w5: D11.5@1235.59,-1991.34 1220,-2006.93 1220,-2070 1250,-2100 1539.21,-2100 1599.37,-2160.16 R13.2@1599.37,-2170 1630,-2170 1640,-2160 1751,-2160 P1.9@1791,-2200
NetD12_1: D12.1 P1.8 R16.1 | length 638.4
  L1-TOP w5: D12.1@1239.22,-2220 v1(1320,-2220) ; v1(1400,-2080) 1419.37,-2060.63 R16.1@1419.37,-2020 1450,-2020 1490,-2060 1651,-2060 P1.8@1691,-2100
  L4-BOT w5: v1(1320,-2220) 1340,-2220 1400,-2160 v1(1400,-2080)
NetD12_3: D12.3 P1.6 R18.1 | length 958.1
  L1-TOP w5: D12.3@1188.04,-2216.16 1188.04,-2238.04 1207.5,-2257.5 1402.5,-2257.5 v1(1420,-2240) ; R18.1@1419.37,-1870 R18.1@1430,-1880.63 ; v1(1430,-1930) R18.1@1430,-1880.63 ; P1.6@1691,-2000 1621,-1930 1490,-1930 1442.64,-1882.64 1432.01,-1882.64 R18.1@1430,-1880.63
  L4-BOT w5: v1(1420,-2240) 1420,-2235.94 1430,-2225.94 v1(1430,-1930)
NetD12_4: D12.4 P1.12 R12.1 | length 609.7
  L1-TOP w5: D12.4@1188.04,-2289.98 1188.04,-2328.04 1220,-2360 1389.21,-2360 1419.37,-2329.84 R12.1@1419.37,-2320 1450,-2320 1500,-2270 1661,-2270 P1.12@1691,-2300
NetD12_5: D12.5 P1.10 R14.1 | length 616
  L1-TOP w5: D12.5@1239.22,-2298.84 1271.16,-2298.84 1300,-2270 1430,-2270 1450,-2250 1450,-2200.63 R14.1@1419.37,-2170 1450,-2170 1490,-2210 1681,-2210 P1.10@1691,-2200
NetD21_1: D21.1 P2.7 R25.2 | length 643.3
  L1-TOP w5: D21.1@1245.59,-1018.66 1268.66,-1018.66 1310,-1060 1560,-1060 1599.37,-1099.37 R25.2@1599.37,-1133.33 1653.33,-1133.33 1670,-1150 1734,-1150 P2.7@1791,-1207
NetD21_3: D21.3 P2.5 R27.2 | length 750.9
  L1-TOP w5: D21.3@1190,-1020.02 1190,-980 1240,-930 1570,-930 1586.89,-946.89 1586.89,-967.52 R27.2@1599.37,-980 1599.37,-986.44 1615.57,-1002.64 1622.64,-1002.64 1680,-1060 1744,-1060 P2.5@1791,-1107
NetD21_4: D21.4 P2.11 R21.2 | length 1016.4
  L1-TOP w5: D21.4@1194.41,-1101.34 1194.41,-1110.2 1170,-1134.61 1170,-1415.77 1224.23,-1470 1569.21,-1470 1599.37,-1439.84 R21.2@1599.37,-1430 1640,-1430 1660,-1450 1740,-1450 1783,-1407 P2.11@1791,-1407
NetD21_5: D21.5 P2.9 R23.2 | length 685.9
  L1-TOP w5: D21.5@1245.59,-1101.34 1250.96,-1106.71 1250.96,-1139.28 1272.7,-1161.02 1278.96,-1161.02 1287.94,-1170 v1(1292,-1170) ; v1(1370,-1210) 1570,-1210 1600,-1240 1600,-1276.04 R23.2@1599.37,-1276.67 1643.33,-1276.67 1660,-1260 1744,-1260 P2.9@1791,-1307
  L4-BOT w5: v1(1292,-1170) 1330,-1170 v1(1370,-1210)
NetD22_1: D22.1 P2.8 R26.1 | length 589.8
  L1-TOP w5: D22.1@1245.59,-1318.66 1245.59,-1309.8 1250.96,-1304.43 1252.75,-1304.43 1314.43,-1242.75 1314.43,-1225.57 1350,-1190 1400,-1190 1419.37,-1170.63 R26.1@1419.37,-1133.33 1428.68,-1142.64 1442.64,-1142.64 1470,-1170 1470.43,-1170 1480.43,-1180 1661.46,-1180 1688.46,-1207 P2.8@1691,-1207
NetD22_3: D22.3 P2.6 R28.1 | length 865.1
  L1-TOP w5: D22.3@1194.41,-1318.66 1190,-1314.25 1191.91,-1312.34 1191.91,-1280 1261.91,-1210 v1(1300,-1210) ; R28.1@1419.37,-980 1419.37,-983.8 1435.57,-1000 1455.94,-1000 1465.94,-1010 v1(1470,-1010) 1490,-1030 1614,-1030 P2.6@1691,-1107
  L4-BOT w5: v1(1300,-1210) 1326.43,-1210 1350,-1233.57 1396.43,-1233.57 1440,-1190 1440,-1040 v1(1470,-1010)
NetD22_4: D22.4 P2.12 R22.1 | length 641.5
  L1-TOP w5: D22.4@1194.21,-1398.02 1199.78,-1403.59 1199.78,-1419.78 1210,-1430 1260,-1430 1320,-1370 1400,-1370 1419.37,-1389.37 R22.1@1419.37,-1430 1432.01,-1417.36 1442.64,-1417.36 1500,-1360 1627.77,-1360 1674.77,-1407 P2.12@1691,-1407
NetD22_5: D22.5 P2.10 R24.1 | length 546.1
  L1-TOP w5: D22.5@1245.59,-1401.34 1258.66,-1401.34 1320,-1340 1400,-1340 1419.37,-1320.63 R24.1@1419.37,-1276.67 1422.7,-1280 1450,-1280 1490,-1320 1630,-1320 1643,-1307 P2.10@1691,-1307
NetD31_1: D31.1 P3.7 R35.2 | length 846.2
  L1-TOP w5: D31.1@329.78,-1895.96 D31.1@324.41,-1901.34 324.41,-1892.48 334.63,-1882.26 334.63,-1881.5 339.02,-1877.11 392.36,-1877.11 525.25,-2010 709.21,-2010 R35.2@769.37,-2070.16 ; R35.2@769.37,-2080 R35.2@769.37,-2070.16 ; P3.7@997,-2004 957.02,-1964.02 875.51,-1964.02 R35.2@769.37,-2070.16
NetD31_3: D31.3 P3.5 R37.2 | length 942
  L1-TOP w5: D31.3@375.59,-1901.34 375.59,-1910.2 380.96,-1915.57 405.57,-1915.57 520,-2030 v1(650,-2030) ; v1(820,-2230) 815.94,-2230 805.94,-2240 779.37,-2240 R37.2@769.37,-2230 779.37,-2220 800,-2220 870,-2150 951,-2150 P3.5@997,-2104
  L4-BOT w5: v1(650,-2030) 820,-2200 v1(820,-2230)
NetD31_4: D31.4 P3.11 R31.2 | length 754.3
  L1-TOP w5: D31.4@375.59,-1818.66 375.59,-1794.41 470,-1700 699.21,-1700 769.37,-1770.16 R31.2@769.37,-1780 ; R31.2@769.37,-1790 840,-1790 870,-1760 953,-1760 P3.11@997,-1804
NetD31_5: D31.5 P3.9 R33.2 | length 774
  L1-TOP w5: D31.5@324.41,-1818.66 329.14,-1823.39 329.14,-1839.14 350,-1860 710,-1860 746.1,-1896.1 746.1,-1896.89 R33.2@769.37,-1920.16 ; R33.2@769.37,-1930 R33.2@769.37,-1920.16 ; P3.9@997,-1904 957.02,-1864.02 869.53,-1864.02 829.6,-1903.96 785.57,-1903.96 R33.2@769.37,-1920.16
NetD32_1: D32.1 P3.8 R36.1 | length 722.5
  L1-TOP w5: D32.1@324.41,-2181.34 324.41,-2172.48 334.63,-2162.26 334.63,-2161.5 348.49,-2147.64 349.62,-2147.64 363.48,-2133.77 545.44,-2133.77 R36.1@589.37,-2089.84 ; R36.1@589.37,-2080 R36.1@589.37,-2089.84 ; P3.8@897,-2004 897,-2020.23 883.23,-2034 883.23,-2036.77 770,-2150 649.53,-2150 R36.1@589.37,-2089.84
NetD32_3: D32.3 P3.6 R38.1 | length 599.5
  L1-TOP w5: D32.3@375.59,-2181.34 550.55,-2181.34 589.37,-2220.16 R38.1@589.37,-2230 620,-2230 660,-2190 811,-2190 P3.6@897,-2104
NetD32_4: D32.4 P3.12 R32.1 | length 1217.2
  L1-TOP w5: D32.4@375.59,-2098.66 375.59,-2107.52 353.11,-2130 310,-2130 280,-2100 280,-1810 430,-1660 569.57,-1660 579.57,-1670 v1(580,-1670) ; v1(580,-1730) 580,-1750.79 599.37,-1770.16 R32.1@599.37,-1780 ; R32.1@599.37,-1790 627.79,-1790 657.79,-1820 864.77,-1820 880.77,-1804 P3.12@897,-1804
  L4-BOT w5: v1(580,-1730) v1(580,-1670)
NetD32_5: D32.5 P3.10 R34.1 | length 725.6
  L1-TOP w5: D32.5@324.41,-2098.66 324.41,-2089.8 384.21,-2030 v1(470,-2030) ; R34.1@589.37,-1930 R34.1@589.37,-1939.84 ; v1@590,-1980 v1(589.37,-1979.37) R34.1@589.37,-1939.84 ; P3.10@897,-1904 886,-1904 810,-1980 629.53,-1980 R34.1@589.37,-1939.84
  L4-BOT w5: v1(470,-2030) 538.74,-2030 v1(589.37,-1979.37)
NetD41_1: D41.1 P4.7 R45.2 | length 984.4
  L1-TOP w5: D41.1@324.41,-1631.34 324.41,-1622.48 334.63,-1612.26 334.63,-1611.5 346.13,-1600 530,-1600 v1(690,-1440) ; v1(730,-1280) 763.17,-1246.83 763.17,-1239.38 779.21,-1223.33 R45.2@779.37,-1223.33 ; R45.2@779.37,-1213.33 R45.2@779.37,-1223.33 ; P4.7@997,-1112 988.02,-1120.98 988.02,-1131.98 960,-1160 872.86,-1160 822.86,-1210 792.7,-1210 R45.2@779.37,-1223.33
  L4-BOT w5: v1(690,-1440) 730,-1400 v1(730,-1280)
NetD41_3: D41.3 P4.5 R47.2 | length 830.8
  L1-TOP w5: D41.3@379.01,-1630 529.21,-1630 779.37,-1379.84 R47.2@779.37,-1370 ; R47.2@779.45,-1379.92 782.01,-1377.36 802.64,-1377.36 830,-1350 830,-1300 870,-1260 950,-1260 997,-1213 P4.5@997,-1212
NetD41_4: D41.4 P4.11 R41.2 | length 1134.6
  L1-TOP w5: D41.4@375.59,-1550 500,-1550 v1(610,-1440) ; v1(740,-960) 740,-959.21 779.37,-919.84 R41.2@779.37,-910 ; R41.2@782.01,-912.64 802.64,-912.64 850,-960 949,-960 P4.11@997,-912
  L4-BOT w5: v1(610,-1440) 670,-1380 670,-1260 720,-1210 720,-980 v1(740,-960)